# EAGLE board BMS Segment rev12 Mechanical Outline (EAGLE 9.6.2)

Size 108 x 248.38 mm. Coordinates in mm from the lower left corner, seen from the top.
Outline: 9,228 9,188 0,188 0,148.05 9,148.05 9,108.05 0,108.05 0,68.11 9,68.11 9,28.11 0,28.11 0,0 95.3,0 95.3,26.67 108,26.67 108,222.98 95.3,222.98 95.3,248.38 0,248.38 0,228 9,228
Copper layers (1*16): Top 0.035mm / dielectric 1.5mm / Bottom 0.035mm
Design rules "Advanced Circuits (2 Layer)": minimum track width 5mil, minimum drill 10mil, track to track 5mil, track to pad 5mil, pad to pad 5mil, via to via 5mil, smd to smd 5mil, copper to edge 10mil, drill to drill 6mil, minimum pad ring 7mil, minimum via ring 5mil, stop-mask expansion 2.5mil, vias tented up to drill 30mil, thermal gap 10mil
Net classes: 1 unfused_hv: clearance 0.025 mm to class 0, clearance 3.2 mm

## Footprints (pad centres in the part's own frame; a part is rotated, then mirrored left to right if it is on the bottom)
KEYSTONE5222 = smd 11.303 x 13.208: P$1 0,0
M3_MOUNTING = hole 3.353: 0,0

## Placement (x,y rotation side)
CELL0  BATTERY_SPRING_KEYSTONE5222  [KEYSTONE5222]  75.66,7.31 270 bottom
CELL1  BATTERY_SPRING_KEYSTONE5222  [KEYSTONE5222]  29,7.31 270 bottom
CELL2  BATTERY_SPRING_KEYSTONE5222  [KEYSTONE5222]  79,31.16 270 bottom
CELL3  BATTERY_SPRING_KEYSTONE5222  [KEYSTONE5222]  29,34.79 270 bottom
CELL4  BATTERY_SPRING_KEYSTONE5222  [KEYSTONE5222]  79,57.81 270 bottom
CELL5  BATTERY_SPRING_KEYSTONE5222  [KEYSTONE5222]  29,61.43 270 bottom
CELL6  BATTERY_SPRING_KEYSTONE5222  [KEYSTONE5222]  79,84.46 270 bottom
CELL7  BATTERY_SPRING_KEYSTONE5222  [KEYSTONE5222]  29,88.08 270 bottom
CELL8  BATTERY_SPRING_KEYSTONE5222  [KEYSTONE5222]  79,111.1 270 bottom
CELL9  BATTERY_SPRING_KEYSTONE5222  [KEYSTONE5222]  29,114.73 270 bottom
CELL10  BATTERY_SPRING_KEYSTONE5222  [KEYSTONE5222]  79,137.75 270 bottom
CELL11  BATTERY_SPRING_KEYSTONE5222  [KEYSTONE5222]  29,141.38 270 bottom
CELL12  BATTERY_SPRING_KEYSTONE5222  [KEYSTONE5222]  79,164.4 270 bottom
CELL13  BATTERY_SPRING_KEYSTONE5222  [KEYSTONE5222]  29,168.02 270 bottom
CELL14  BATTERY_SPRING_KEYSTONE5222  [KEYSTONE5222]  79,191.05 270 bottom
CELL15  BATTERY_SPRING_KEYSTONE5222  [KEYSTONE5222]  29,194.67 270 bottom
CELL16  BATTERY_SPRING_KEYSTONE5222  [KEYSTONE5222]  79,217.69 270 bottom
CELL17  BATTERY_SPRING_KEYSTONE5222  [KEYSTONE5222]  29,221.32 270 bottom
CELL18  BATTERY_SPRING_KEYSTONE5222  [KEYSTONE5222]  75.66,241.2 270 bottom
U$9  [M3_MOUNTING]  103.65,216.98 0 top
U$10  [M3_MOUNTING]  5,240.38 0 top
U$11  [M3_MOUNTING]  5,153.05 0 top
U$12  [M3_MOUNTING]  5,183 0 top
U$13  [M3_MOUNTING]  5,73.11 0 top
U$14  [M3_MOUNTING]  5,103.05 0 top
U$15  [M3_MOUNTING]  103.65,163.05 0 top
U$16  [M3_MOUNTING]  101.65,93.05 0 top
U$17  [M3_MOUNTING]  5,15.73 0 top
U$18  [M3_MOUNTING]  101.65,39.13 0 top
U$19  [M3_MOUNTING]  53.33,73.27 0 top
U$20  [M3_MOUNTING]  53.33,126.77 0 top
U$21  [M3_MOUNTING]  53.33,180.27 0 top

## Library data of the parts
CELL0 CELL1-CELL18 U$9-U$21 = HyTechDevices